# Altium PCB RWSv3.PcbDoc
Units mil, origin at the board's own origin, x right, y up, seen from the top; angles counter-clockwise.
Board outline 3700 x 3475 mil, 2 copper layers (Component Side, Bottom Layer), stack 65.756 mil thick; 70 components, 58 nets, 326 pads, 94 vias.
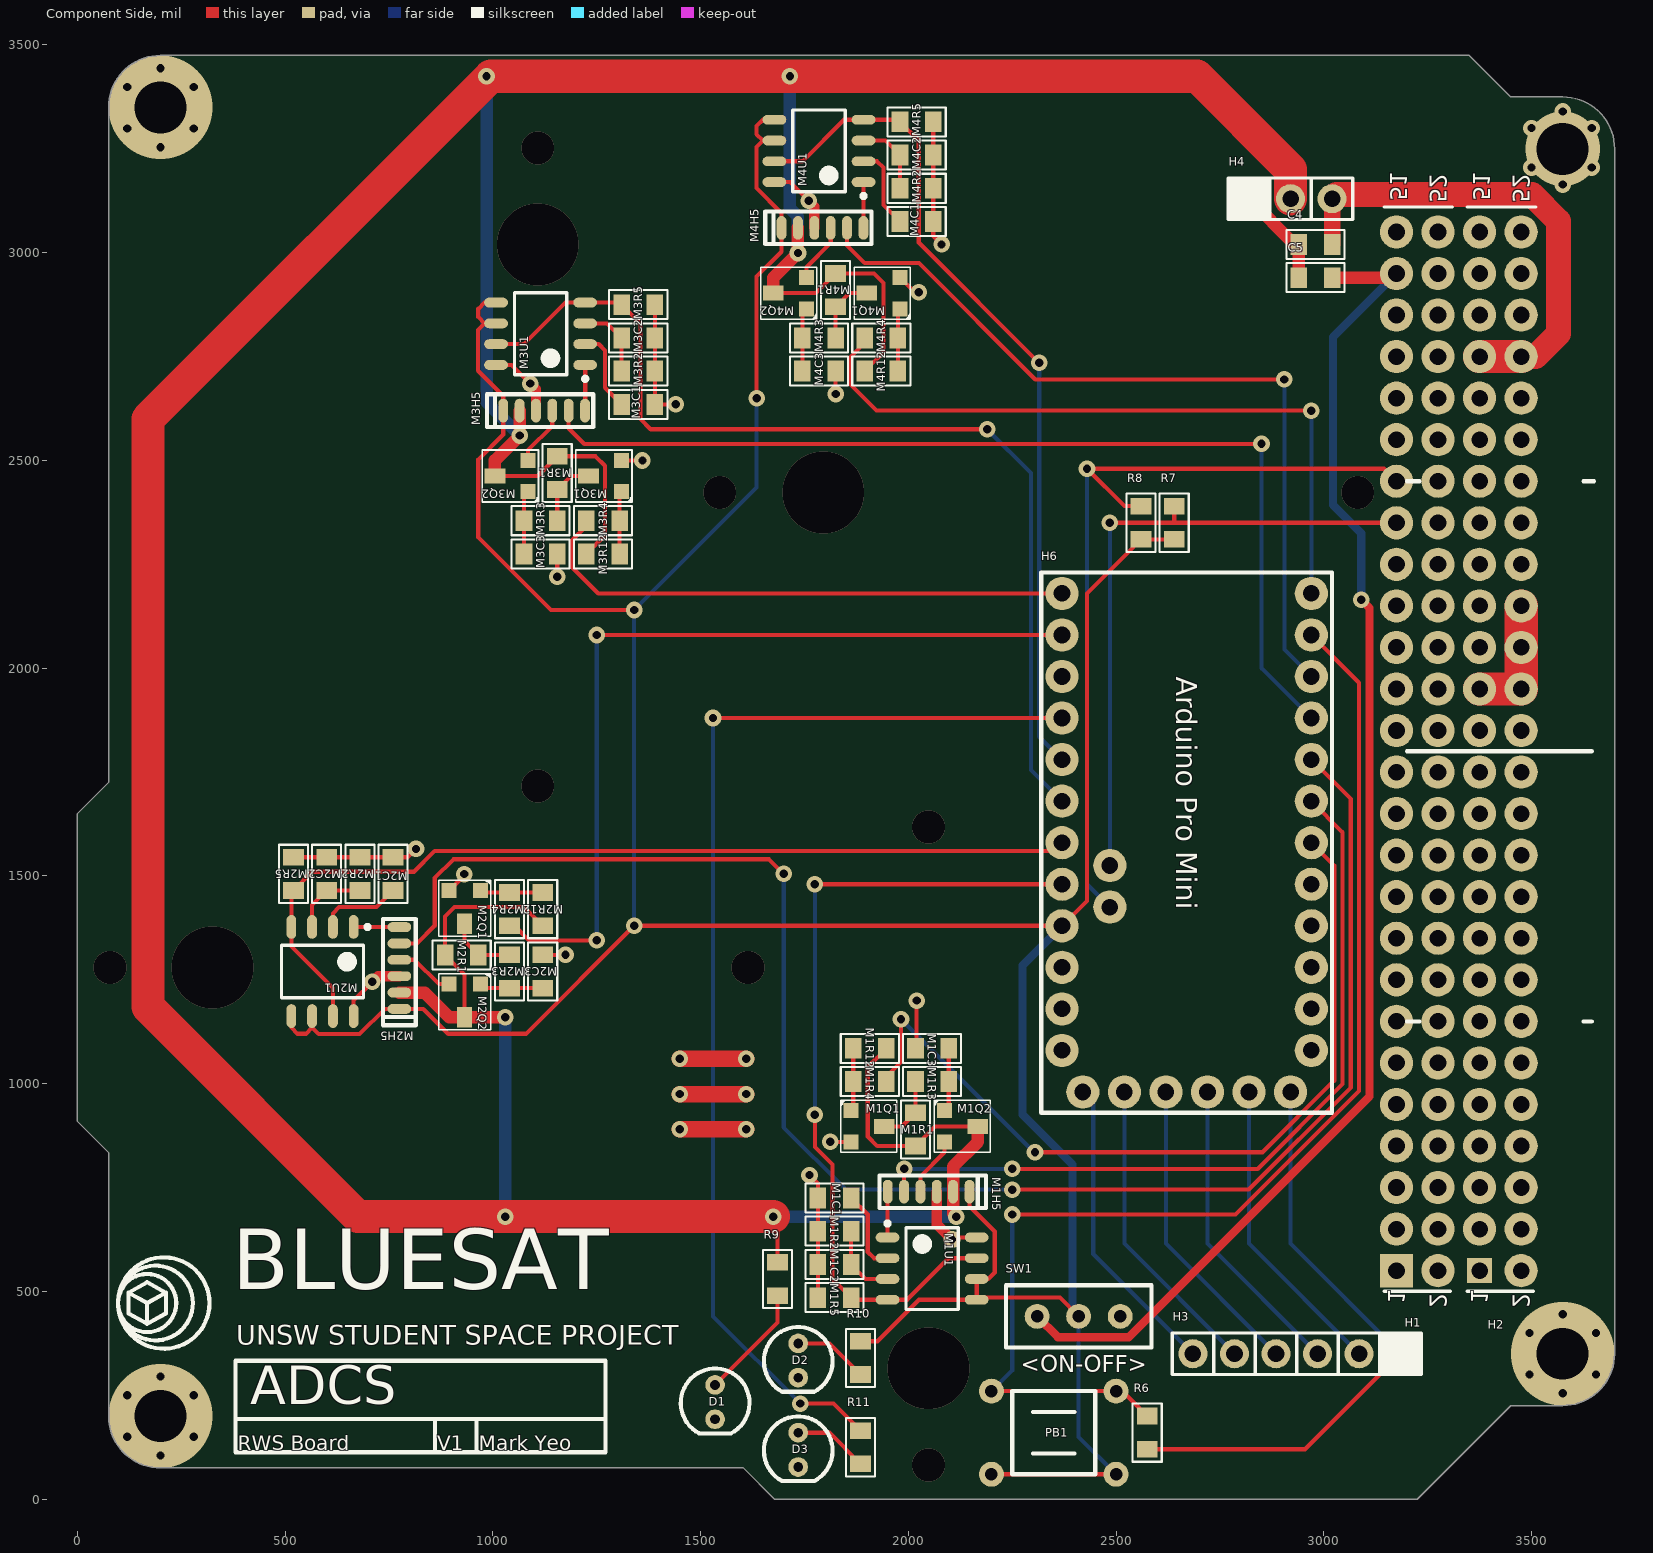
[diagram p0: Component Side view]
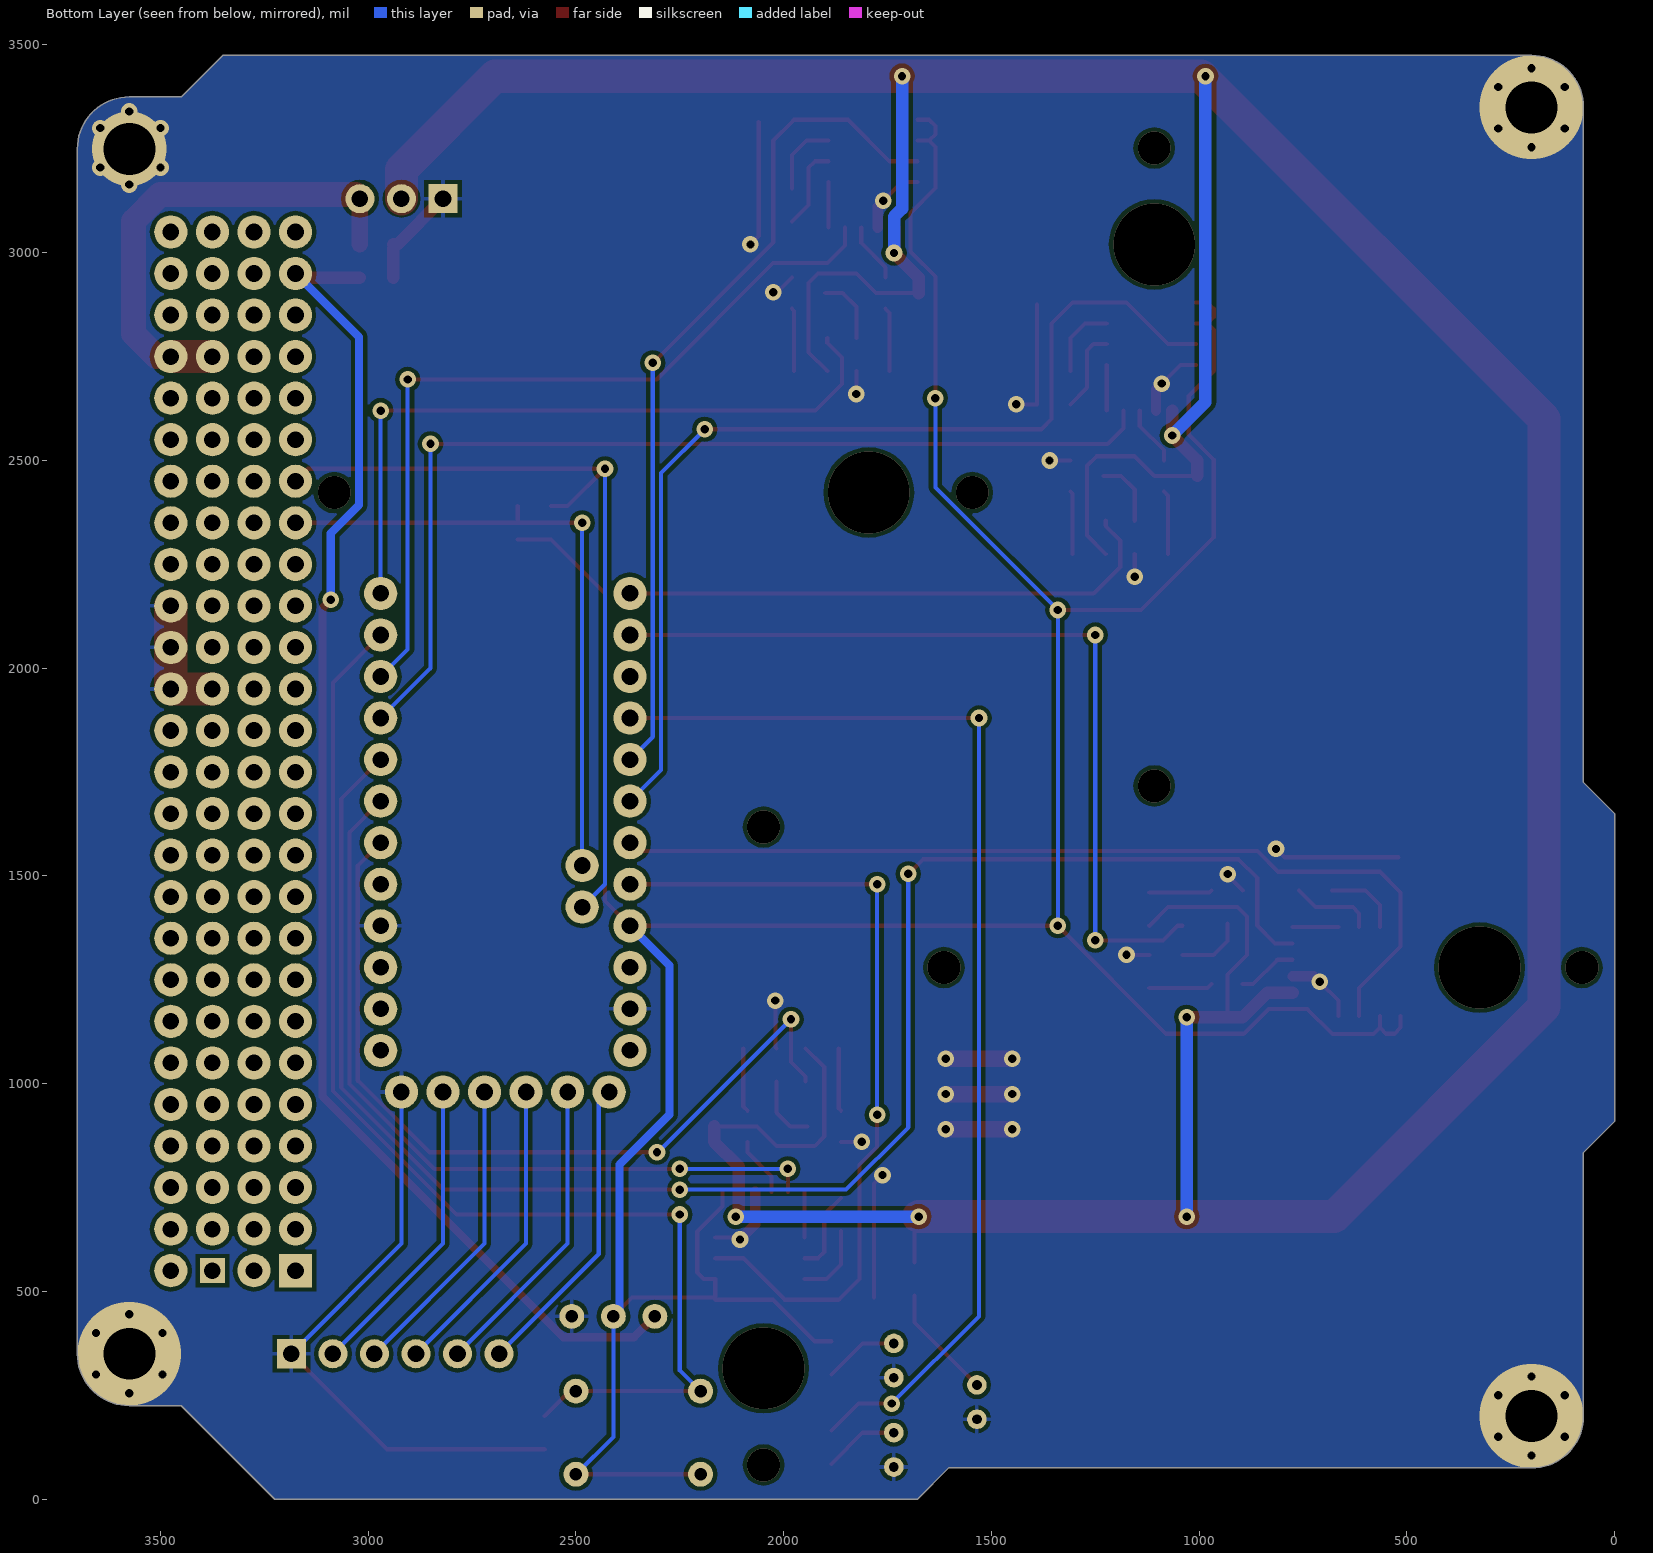
[diagram p1: Bottom Layer view, seen from below]

## Layer stack, top to bottom
Top Solder: solder mask 0.394, Solder Resist, Dk 3.5
Component Side: signal copper 1.378
Dielectric 1: core 63, FR-4, Dk 4.2
Bottom Layer: signal copper 1.378
Solder Side: solder mask 0.394, Solder Resist, Dk 3.5

## Board outline
3575,225 ccw(c3575,350) 3700,350 3700,3250 ccw(c3575,3250) 3575,3375 3450,3375 3350,3475 200,3475 ccw(c200,3350) 75,3350 75,1725 0,1650 0,909 75,834 75,200 ccw(c200,200) 200,75 1603,75 1678,0 3225,0 3450,225

## Design rules (kind name [scope] priority, off if disabled: settings)
Clearance [All] p1: gap=10
Clearance "Clearance (Same Net)" [All] p2: gap=0 except(8: SMDPad-SMDPad SMDPad-THPad SMDPad-Via)
ComponentClearance [All] p1: gap=0 collisioncheckmode=3 verticalgap=0 showdistances=FALSE
HoleSize HoleSize_1 [All] p1 off: absolutevalues=TRUE maxlimit=100000 minlimit=24 maxpercent=80.000 minpercent=20.000
HoleSize HoleSize_2 [All] p2: absolutevalues=TRUE maxlimit=100000 minlimit=20 maxpercent=80.000 minpercent=20.000
HoleSize [All] p3: absolutevalues=TRUE maxlimit=100 minlimit=1 maxpercent=80.000 minpercent=20.000
HoleToHoleClearance mdViaViaSameLayer [All] p1: gap=8 allowstackedmicrovias=TRUE
HoleToHoleClearance [All] p2: gap=10 allowstackedmicrovias=TRUE
PasteMaskExpansion mlMinCreamFrame [All] p1: expansion=0
PasteMaskExpansion [All] p2: expansion=0
PolygonConnect ThermalVias [IsVia] p1: connectstyle=Direct reliefconductorwidth=10 reliefentries=4 polygonreliefangle="90 Angle" airgapwidth=10
PolygonConnect [All] p2: connectstyle=Relief reliefconductorwidth=10 reliefentries=4 polygonreliefangle="90 Angle" airgapwidth=10
RoomDefinition M4 [InComponentClass('M4')] p1: confinementstyle=ConfineIn formatcopy=TRUE lockcomponents=FALSE outline 2102.28,2580 2102.28,3360 1612.28,3360 1612.28,2580
RoomDefinition M3 [InComponentClass('M3')] p2: confinementstyle=ConfineIn formatcopy=TRUE lockcomponents=FALSE outline 1432.28,2140 1432.28,2920 942.28,2920 942.28,2140
RoomDefinition M2 [InComponentClass('M2')] p3: confinementstyle=ConfineIn formatcopy=TRUE lockcomponents=FALSE outline 1255,1587.28 475,1587.28 475,1097.28 1255,1097.28
RoomDefinition M1 [InComponentClass('M1')] p4: confinementstyle=ConfineIn formatcopy=TRUE lockcomponents=FALSE outline 1740,1220 1740,440 2230,440 2230,1220
RoutingVias [All] p1: holewidth=28 width=50 viastyle="Through Hole" minholewidth=28 minwidth=50 maxholewidth=28 maxwidth=50
SilkToSilkClearance [All] p1 off: silktosilkclearance=10
SilkToSolderMaskClearance [IsPad] p1 off: minsilkscreentomaskgap=10 clearancetoexposedcopper=TRUE
SolderMaskExpansion mlMinStopFrame [All] p1: expansion=4
SolderMaskExpansion [All] p2: expansion=4
Width Width_1 [All] p1: maxlimit=100000 minlimit=6 preferedwidth=10
Width [All] p2: maxlimit=10 minlimit=8 preferedwidth=10
24 further rules are at their usual default settings.

## Classes and differential pairs
channel class MotorCircuit: M1 M2 M3 M4
net class SPDMOT[4..1]: SPDMOT1 SPDMOT2 SPDMOT3 SPDMOT4
net class FREQMOT[4..1]: FREQMOT1 FREQMOT2 FREQMOT3 FREQMOT4
net class DIRMOT[4..1]: DIRMOT1 DIRMOT2 DIRMOT3 DIRMOT4
component class RWSv3: C4 C5 D1 D2 D3 H1 H2 H3 H4 H6 L1 PB1 R5 R6 R7 R8 R9 R10 R11 SW1
component class M1: M1C1 M1C2 M1C3 M1H5 M1Q1 M1Q2 M1R1 M1R2 M1R3 M1R4 M1R5 M1R12 M1U1
component class M2: M2C1 M2C2 M2C3 M2H5 M2Q1 M2Q2 M2R1 M2R2 M2R3 M2R4 M2R5 M2R12 M2U1
component class M3: M3C1 M3C2 M3C3 M3H5 M3Q1 M3Q2 M3R1 M3R2 M3R3 M3R4 M3R5 M3R12 M3U1
component class M4: M4C1 M4C2 M4C3 M4H5 M4Q1 M4Q2 M4R1 M4R2 M4R3 M4R4 M4R5 M4R12 M4U1

## Components (designator, comment, footprint, x,y, rotation, side; value= is the part's Value field where it differs from the comment)
C4 "100nF" 0805C-TBD 3010,3020 r180 top
C5 "100nF" 0805C-TBD 3010,2940 r180 top
D1 "LED" LED 1535,275 r0 top
D2 "LED" LED 1735,375 r0 top
D3 "LED" LED 1735,160 r0 top
H1 "26X2 Header" "26X2 Header"#1 3175,550 r90 top
H2 "26X2 Header" "26X2 Header"#2 3375,550 r90 top
H3 "HEADER-1X6" HEADER-1X6 3185,350 r270 top
H4 "HEADER-1X3" HEADER-1X3 2820,3130 r90 top
H6 "Arduino Pro Mini" "Arduino Pro Mini" 2970,1080 r180 top
M1C1 "10nF" 0805C-TBD 1852.28,725 r180 top (schematic designator C1)
M1C2 "1uF" 0805C-GENERIC 1852.28,565 r180 top (schematic designator C2)
M1C3 "1uF" 0805C-GENERIC 2087.28,1085 r180 top (schematic designator C3)
M1H5 "Motor Header" "Motor Header" 2147.28,740 r270 top (schematic designator H5)
M1Q1 "MMBT3904" SOT23-BCE 1862.28,935 r0 top (schematic designator Q1)
M1Q2 "MMBT3904" SOT23-BCE 2087.28,935 r0 top (schematic designator Q2)
M1R1 "1K" 0805R-1K 2017.28,860 r90 top (schematic designator R1)
M1R2 "100K" 0805R-100K 1852.28,645 r180 top (schematic designator R2)
M1R3 "150K" 0805R-150K 2027.28,1005 r0 top (schematic designator R3)
M1R4 "10K" 0805R-10K 1947.28,1005 r180 top (schematic designator R4)
M1R5 "10K" 0805R-10K 1862.28,485 r180 top (schematic designator R5)
M1R12 "10K" 0805R-10K 1867.28,1085 r0 top (schematic designator R12)
M1U1 "LM2907" LM2907 2057.28,555 r0 top (schematic designator U1)
M2C1 "10nF" 0805C-TBD 760,1475 r90 top (schematic designator C1)
M2C2 "1uF" 0805C-GENERIC 600,1475 r90 top (schematic designator C2)
M2C3 "1uF" 0805C-GENERIC 1120,1240 r90 top (schematic designator C3)
M2H5 "Motor Header" "Motor Header" 775,1180 r180 top (schematic designator H5)
M2Q1 "MMBT3904" SOT23-BCE 970,1465 r270 top (schematic designator Q1)
M2Q2 "MMBT3904" SOT23-BCE 970,1240 r270 top (schematic designator Q2)
M2R1 "1K" 0805R-1K 895,1310 r0 top (schematic designator R1)
M2R2 "100K" 0805R-100K 680,1475 r90 top (schematic designator R2)
M2R3 "150K" 0805R-150K 1040,1300 r270 top (schematic designator R3)
M2R4 "10K" 0805R-10K 1040,1380 r90 top (schematic designator R4)
M2R5 "10K" 0805R-10K 520,1465 r90 top (schematic designator R5)
M2R12 "10K" 0805R-10K 1120,1460 r270 top (schematic designator R12)
M2U1 "LM2907" LM2907 590,1270 r270 top (schematic designator U1)
M3C1 "10nF" 0805C-TBD 1320,2635 r0 top (schematic designator C1)
M3C2 "1uF" 0805C-GENERIC 1320,2795 r0 top (schematic designator C2)
M3C3 "1uF" 0805C-GENERIC 1085,2275 r0 top (schematic designator C3)
M3H5 "Motor Header" "Motor Header" 1025,2620 r90 top (schematic designator H5)
M3Q1 "MMBT3904" SOT23-BCE 1310,2425 r180 top (schematic designator Q1)
M3Q2 "MMBT3904" SOT23-BCE 1085,2425 r180 top (schematic designator Q2)
M3R1 "1K" 0805R-1K 1155,2500 r270 top (schematic designator R1)
M3R2 "100K" 0805R-100K 1320,2715 r0 top (schematic designator R2)
M3R3 "150K" 0805R-150K 1145,2355 r180 top (schematic designator R3)
M3R4 "10K" 0805R-10K 1225,2355 r0 top (schematic designator R4)
M3R5 "10K" 0805R-10K 1310,2875 r0 top (schematic designator R5)
M3R12 "10K" 0805R-10K 1305,2275 r180 top (schematic designator R12)
M3U1 "LM2907" LM2907 1115,2805 r180 top (schematic designator U1)
M4C1 "10nF" 0805C-TBD 1990,3075 r0 top (schematic designator C1)
M4C2 "1uF" 0805C-GENERIC 1990,3235 r0 top (schematic designator C2)
M4C3 "1uF" 0805C-GENERIC 1755,2715 r0 top (schematic designator C3)
M4H5 "Motor Header" "Motor Header" 1695,3060 r90 top (schematic designator H5)
M4Q1 "MMBT3904" SOT23-BCE 1980,2865 r180 top (schematic designator Q1)
M4Q2 "MMBT3904" SOT23-BCE 1755,2865 r180 top (schematic designator Q2)
M4R1 "1K" 0805R-1K 1825,2940 r270 top (schematic designator R1)
M4R2 "100K" 0805R-100K 1990,3155 r0 top (schematic designator R2)
M4R3 "150K" 0805R-150K 1815,2795 r180 top (schematic designator R3)
M4R4 "10K" 0805R-10K 1895,2795 r0 top (schematic designator R4)
M4R5 "10K" 0805R-10K 1980,3315 r0 top (schematic designator R5)
M4R12 "10K" 0805R-10K 1975,2715 r180 top (schematic designator R12)
M4U1 "LM2907" LM2907 1785,3245 r180 top (schematic designator U1)
PB1 "PushButton" PushButton 2500,260 r180 top
R6 "4K7" 0805R-4K7 2575,190 r270 top
R7 "4K7" 0805R-4K7 2640,2320 r90 top
R8 "4K7" 0805R-4K7 2560,2320 r90 top
R9 "150R" 0805R-150 1685,560 r270 top
R10 "150R" 0805R-150 1885,370 r270 top
R11 "150R" 0805R-150 1885,155 r270 top
SW1 "ToggleSwitch" SWITCHFOOTPRINT 2310,440 r270 top

## Footprints (in the part's own frame and the unit in brackets; to place one, negate y for a bottom-side part, rotate by r counter-clockwise, add the part's x,y. Pads: shape width x height; smd on the part's side, far side on the other; paste and mask are expansions set on the pad)
"26X2 Header"#1 [mil]
  rect 80x80 hole 40: 1(0,0)
  round 80 hole 40: 2(0,-100) 3(100,0) 4(100,-100) 5(200,0) 6(200,-100) 7(300,0) 8(300,-100) 9(400,0) 10(400,-100) 11(500,0) 12(500,-100) 13(600,0) 14(600,-100) 15(700,0) 16(700,-100) 17(800,0) 18(800,-100) 19(900,0) 20(900,-100) 21(1000,0) 22(1000,-100) 23(1100,0) 24(1100,-100) 25(1200,0) 26(1200,-100) 27(1300,0) 28(1300,-100) 29(1400,0) 30(1400,-100) 31(1500,0) 32(1500,-100) 33(1600,0) 34(1600,-100) 35(1700,0) 36(1700,-100) 37(1800,0) 38(1800,-100) 39(1900,0) 40(1900,-100) 41(2000,0) 42(2000,-100) 43(2100,0) 44(2100,-100) 45(2200,0) 46(2200,-100) 47(2300,0) 48(2300,-100) 49(2400,0) 50(2400,-100) 51(2500,0) 52(2500,-100)
  silkscreen extent -50,-135 2560,30, body extent -55,-150 2555,47, height 126
"26X2 Header"#2 [mil]
  rect 60x60 hole 40: 1(0,0)
  round 80 hole 40: 2(0,-100) 3(100,0) 4(100,-100) 5(200,0) 6(200,-100) 7(300,0) 8(300,-100) 9(400,0) 10(400,-100) 11(500,0) 12(500,-100) 13(600,0) 14(600,-100) 15(700,0) 16(700,-100) 17(800,0) 18(800,-100) 19(900,0) 20(900,-100) 21(1000,0) 22(1000,-100) 23(1100,0) 24(1100,-100) 25(1200,0) 26(1200,-100) 27(1300,0) 28(1300,-100) 29(1400,0) 30(1400,-100) 31(1500,0) 32(1500,-100) 33(1600,0) 34(1600,-100) 35(1700,0) 36(1700,-100) 37(1800,0) 38(1800,-100) 39(1900,0) 40(1900,-100) 41(2000,0) 42(2000,-100) 43(2100,0) 44(2100,-100) 45(2200,0) 46(2200,-100) 47(2300,0) 48(2300,-100) 49(2400,0) 50(2400,-100) 51(2500,0) 52(2500,-100)
  silkscreen extent -50,-135 2560,30, body extent -55,-150 2555,47, height 126
0805C-GENERIC [mil] "CAPACITOR 0805"
  rect 40x50 smd: 1(-10,0) 2(70,0)
  silkscreen extent -40,-35 100,35, body extent -11,-25 70,25, height 26
0805C-TBD [mil] "CAPACITOR 0805"
  rect 40x50 smd: 1(-10,0) 2(70,0)
  silkscreen extent -40,-35 100,35, body extent -11,-25 70,25, height 26
0805R-1K [mil] "RESISTOR 0805"
  rect 40x50 smd: 1(-10,0) 2(70,0)
  silkscreen extent -40,-35 100,35, body extent -11,-25 70,25, height 27
0805R-4K7 [mil] "RESISTOR 0805"
  rect 40x50 smd: 1(-10,0) 2(70,0)
  silkscreen extent -40,-35 100,35, body extent -11,-25 70,25, height 27
0805R-10K [mil] "RESISTOR 0805"
  rect 40x50 smd: 1(0,0) 2(80,0)
  silkscreen extent -30,-35 110,35, body extent -1,-25 80,25, height 27
0805R-100K [mil] "RESISTOR 0805"
  rect 40x50 smd: 1(-10,0) 2(70,0)
  silkscreen extent -40,-35 100,35, body extent -11,-25 70,25, height 27
0805R-150 [mil] "RESISTOR 0805"
  rect 40x50 smd: 1(-10,0) 2(70,0)
  silkscreen extent -40,-35 100,35, body extent -11,-25 70,25, height 27
0805R-150K [mil] "RESISTOR 0805"
  rect 40x50 smd: 1(-10,0) 2(70,0)
  silkscreen extent -40,-35 100,35, body extent -11,-25 70,25, height 27
"Arduino Pro Mini" [mil]
  round 80 hole 40: 1(0,0) 2(0,-100) 3(0,-200) 4(0,-300) 5(0,-400) 6(0,-500) 7(0,-600) 8(0,-700) 9(0,-800) 10(0,-900) 11(0,-1000) 12(0,-1100) 13(600,0) 14(600,-100) 15(600,-200) 16(600,-300) 17(600,-400) 18(600,-500) 19(600,-600) 20(600,-700) 21(600,-800) 22(600,-900) 23(600,-1000) 24(600,-1100) 25(485,-345) 26(485,-445) 27(50,100) 28(150,100) 29(250,100) 30(350,100) 31(450,100) 32(550,100)
  silkscreen extent -50,-1150 650,150
HEADER-1X3 [mil]
  rect 70x70 hole 40: 1(0,0)
  round 70 hole 40: 2(0,-100) 3(0,-200)
  silkscreen extent -50,-250 50,50, body extent -50,-250 50,50, height 470
HEADER-1X6 [mil]
  rect 70x70 hole 40: 1(0,0)
  round 70 hole 40: 2(0,-100) 3(0,-200) 4(0,-300) 5(0,-400) 6(0,-500)
  silkscreen extent -50,-550 50,50, body extent -50,-550 50,50, height 470
LED [mm]
  round 1.2 hole 0.6: 1(0,0) 2(0,-2.1)
  silkscreen extent -2.1,-2.96 2.1,1
LM2907 [mm] "Frequency to Voltage Converter"
  oval 1.45x0.6 smd: 1(-2.725,1.905) 2(-2.725,0.635) 3(-2.725,-0.635) 4(-2.725,-1.905) 5(2.725,-1.905) 6(2.725,-0.635) 7(2.725,0.635) 8(2.725,1.905)
  silkscreen extent -2.85,-2.5 1.6,2.88, body extent -3,-2.5 3,2.5, height 1.75
"Motor Header" [mm]
  oval 1.45x0.6 smd: 1(0,0) 2(0,-1) 3(0,-2) 4(0,-3) 5(0,-4) 6(0,-5)
  silkscreen extent -1,-5.5 1,1
PushButton [mil]
  round 60 hole 30: 5(0,0) 6(300,0) 7(0,200) 8(300,200)
  silkscreen extent 50,0 250,200, body extent 50,0 250,200, height 300
SOT23-BCE [mil]
  rect 36x36 smd: B(0,0) E(0,-75)
  rect 50x36 smd: C(80,-38)
  silkscreen extent -25,-100 110,25, body extent -3,-95 94,20, height 41
SWITCHFOOTPRINT [mil]
  round 60 hole 30: 2(0,0) 3(0,100) 4(0,200)
  silkscreen extent -75,-75 75,275, body extent -75,-75 75,275, height 300

## Part data
C4 C5 M1C1 M2C1 M3C1 M4C1: library part 0805C-100nF-25V-X7R-MUR, "CAPACITOR 0805 CERAMIC"
D1 D2 D3: "Small LED"
M1C2 M2C2 M3C2 M4C2: library part 0805C-10UF-6V3-X5R-PAN, "CAPACITOR 0805 CERAMIC"
M1C3 M2C3 M3C3 M4C3: library part 0805C-2U2-6V3-X5R-PAN, "CAPACITOR 0805 CERAMIC"
M1Q1 M1Q2 M2Q1 M2Q2 M3Q1 M3Q2 M4Q1 M4Q2: library part MMBT2222, "BC847 SMALL SIGNAL NPN TRANSISTOR"
M1R1 M2R1 M3R1 M4R1: library part 0805R-1K, "RESISTOR 0805 1/4 WATT THIN FILM"
M1R2 M2R2 M3R2 M4R2: library part 0805R-100K, "RESISTOR 0805 1/4 WATT THIN FILM"
M1R3 M2R3 M3R3 M4R3: library part 0805R-150K, "RESISTOR 0805 1/4 WATT THIN FILM"
M1R4 M1R5 M1R12 M2R4 M2R5 M2R12 M3R4 M3R5 M3R12 M4R4 M4R5 M4R12: library part 0805R-10K, "RESISTOR 0805 1/4 WATT THIN FILM"
M1U1 M2U1 M3U1 M4U1: "Freq to Voltage Converter"
R6 R7 R8: library part 0805R-4K7, "RESISTOR 0805 1/4 WATT THIN FILM"
R9 R10 R11: library part 0805R-150, "RESISTOR 0805 1/4 WATT THIN FILM"

## Via types
v1: diameter 40, hole 20, Component Side to Bottom Layer, 78 vias
v2: diameter 78.74, hole 78.74, Component Side to Bottom Layer, 8 vias
v3: diameter 196.85, hole 196.85, Component Side to Bottom Layer, 4 vias
v4: diameter 250, hole 125, Component Side to Bottom Layer, 3 vias
v5: diameter 180, hole 125, Component Side to Bottom Layer, 1 vias

## Nets (pads, with @x,y where several pads share a name; then routed paths per layer and width w, separated by ;. In a path a pad name is that pad's centre, name@x,y a point inside that pad or via, vN(x,y) a via of type N, cw(c..) or ccw(c..) an arc to the next point about the centre after c; other vN are vias at no path point)
3V3_IN: H1.50
5V_IN: C5.1 H1.49 SW1.2 | length 3300.9
  Component Side w20: SW1.2@2310,439.29 SW1.2 2360,390 2530.71,390 3110,969.29 3110,2145 v1(3090,2165)
  Component Side w30: C5.1 3165,2940 H1.49
  Bottom Layer w20: v1(3090,2165) 3090,2325 3022.13,2392.87 3022.13,2797.13 H1.49
7V4: H4.2 M1H5.2 M1Q2.C M1R1.1 M1R12.2 M2H5.2 M2Q2.C M2R1.1 M2R12.2 M3H5.2 M3Q2.C M3R1.1 M3R12.2 M4H5.2 M4Q2.C M4R1.1 M4R12.2 R9.1 | length 11731.3
  Component Side w10: M2Q2.C 932,1263 M2R1.1 885,1402.21 907.79,1425 1075,1425 M2R12.2 ; M3Q2.C 1108,2463 M3R1.1 1247.21,2510 1270,2487.21 1270,2320 M3R12.2 ; v1(1675,680) 1685,670 R9.1 ; M4Q2.C 1778,2903 M4R1.1 1917.21,2950 1940,2927.21 1940,2760 M4R12.2 ; M1R12.2 1902.28,1040 1902.28,872.79 1925.07,850 M1R1.1 2064.28,897 M1Q2.C
  Component Side w30: M2H5.2 835.63,1219.37 895,1160 M2Q2.C v1(1030,1160) ; M3Q2.C 1005,2500 1064.37,2559.37 M3H5.2 ; M4Q2.C 1675,2940 v1(1734.37,2999.37) M4H5.2 ; v1(2115,680) 2107.91,687.09 M1H5.2 2107.91,800.63 2167.28,860 M1Q2.C
  Component Side w80: v1(1675,680) v1(1030,680) 675,680 170,1185 170,2600 995,3425 2695,3425 2920,3200 H4.2
  Bottom Layer w30: v1(984.84,3424.84) 984.84,2640.16 v1(1065,2560) ; v1(1030,680) v1(1030,1160) ; v1(1675,680) v1(2115,680) ; 1715,3106.36 1734.37,3086.99 v1(1734.37,2999.37) ; 1715,3111.36 v1(1715,3425)
7V4_IN: C4.1 H2.45 H2.46 H4.3 | length 1155.3
  Component Side w40: C4.1 H4.3
  Component Side w60: H4.3@3030,3140 3501.01,3140 3565,3076.01 3565,2805 3510,2750 H2.46
  Component Side w80: H2.45 H2.46
DIRMOT1: H6.7 M1H5.5 | length 1906.6
  Component Side w10: M1H5.5 v1(1990,795) ; v1(2250,795) 2841.07,795 3045,998.93 3045,1605 H6.7
  Bottom Layer w10: v1(1990,795) v1(2250,795)
DIRMOT2: H6.8 M2H5.5 | length 4058.3
  Component Side w10: M2H5.5 817.48,1337.48 860,1380 860,1495 905,1540 1665,1540 v1(1700,1505) ; v1(2250,745) 2819.35,745 3065,990.65 3065,1685 H6.8
  Bottom Layer w10: v1(1700,1505) 1700,895 1850,745 v1(2250,745)
DIRMOT3: H6.9 M3H5.5 | length 2435.2
  Component Side w10: M3H5.5 1182.48,2577.52 1220,2540 v1(2850,2540)
  Bottom Layer w10: v1(2850,2540) 2850,2000 H6.9
DIRMOT4: H6.10 M4H5.5 | length 1970.5
  Component Side w10: M4H5.5 1852.48,3017.52 1895,2975 2025.5,2975 2305.5,2695 v1(2905,2695)
  Bottom Layer w10: v1(2905,2695) 2905,2045 H6.10
FREQMOT1: H6.17 M1R5.1 M1U1.4 M1U1.7 | length 1971.9
  Component Side w10: v1(1775,925) 1775,847.79 1817.28,805.5 1817.28,530 M1R5.1 1867.28,480 M1U1.4 1997.28,480 2097.28,580 M1U1.7 ; v1(1775,1480) H6.17
  Bottom Layer w10: v1(1775,925) v1(1775,1480)
FREQMOT2: H6.18 M2R5.1 M2U1.4 M2U1.7 | length 2243.4
  Component Side w10: M2U1.7 615,1230 515,1330 M2U1.4 515,1460 M2R5.1 565,1510 810,1510 860,1560 2350,1560 H6.18
FREQMOT3: H6.19 M3R5.1 M3U1.4 M3U1.7 | length 2454.3
  Component Side w10: M3U1.7 1075,2780 1175,2880 M3U1.4 1305,2880 M3R5.1 1355,2830 1355,2600 1380,2575 v1(2190,2575)
  Bottom Layer w10: v1(2190,2575) 2295,2470 2295,1755 H6.19
FREQMOT4: H6.20 M4R5.1 M4U1.4 M4U1.7 | length 2042.3
  Component Side w10: M4U1.7 1745,3220 1845,3320 M4U1.4 1975,3320 M4R5.1 2025,3270 2025,3025 v1(2315,2735)
  Bottom Layer w10: v1(2315,2735) 2315,1835 H6.20
GND: C4.2 C5.2 D1.2 D2.2 D3.2 H2.29 H2.30 H2.32 H2.34 H3.1 H4.1 H6.4 H6.14 H6.27 M1C1.2 M1C2.2 M1C3.2 M1H5.3 M1Q1.E M1R2.2 M1R5.2 M1U1.8 M2C1.2 M2C2.2 M2C3.2 M2H5.3 M2Q1.E M2R2.2 M2R5.2 M2U1.8 M3C1.2 M3C2.2 M3C3.2 M3H5.3 M3Q1.E M3R2.2 M3R5.2 M3U1.8 M4C1.2 M4C2.2 M4C3.2 M4H5.3 M4Q1.E M4R2.2 M4R5.2 M4U1.8 R6.2 SW1.4 | length 4858
  Component Side w10: M2R5.2 M2C2.2 M2R2.2 M2C1.2 795,1545 v1(815,1565) ; M2U1.8 665,1200 v1(710,1245) ; M2Q1.E 931.09,1501.09 v1(931.09,1504.51) ; M3U1.8 1045,2730 v1@1103.74,2671.26 ; M2C3.2 v1(1175,1310) ; v1(1155,2220) M3C3.2 ; M3Q1.E v1(1360,2500) ; M3R5.2 M3C2.2 M3R2.2 M3C1.2 v1(1440,2635) ; M4U1.8 1715,3170 v1@1773.74,3111.26 ; v1(1762.28,780) 1782.28,760 M1C1.2 M1R2.2 M1C2.2 M1R5.2 ; v1(1812.28,860) M1Q1.E ; v1(1825,2660) M4C3.2 ; M4Q1.E 2015,2905 v1(2025,2905) ; M1C3.2 2020,1087.72 v1(2020,1200) ; M4R5.2 M4C2.2 M4R2.2 M4C1.2 2060,3040 v1(2080,3020) ; v1@2100,630 M1U1.8 ; R6.2 2955,120 H3.1
  Component Side w25: v1(710,1245) 723.74,1258.74 M2H5.3 ; M3H5.3 v1@1103.74,2671.26 ; M4H5.3 v1@1773.74,3111.26 ; M1H5.3 2068.54,661.46 v1@2100,630
  Component Side w30: H4.1 2930,3020 C4.2 ; C5.2 C4.2@2940,3010
  Component Side w40: v1(1450,890) v1(1610,890) ; v1(1450,975) v1(1610,975) ; v1(1450,1060) v1(1610,1060)
  Component Side w80: H2.29 H2.30 H2.32 H2.34
  Bottom Layer w10: H6.27 2920,615 H3.1
  other v1: 200,105 120,150 280,150 120,250 280,250 3575,255 200,295 3495,300 3655,300 3495,400 3655,400 3575,445 2105,625 1090,2685 1760,3125 3575,3164 3500,3205 3645,3205 200,3254 120,3299 280,3299 3500,3300 3645,3300 3575,3340 120,3399 280,3399 200,3444
  other v4: 200,200 3575,350 200,3350
  other v5: 3575,3250
LED_G: H6.21 R11.1 | length 2748.9
  Component Side w10: v1(1530,1880) H6.21 ; v1(1740,230) 1820,230 R11.1
  Bottom Layer w10: v1(1530,1880) 1530,440 v1(1740,230)
M1FREQ: M1H5.6 M1U1.1 | length 109.6
  Component Side w10: M1U1.1 M1H5.6@1950,739.57
M1SPD: M1H5.4 M1Q2.E | length 144.1
  Component Side w10: M1H5.4 2029.17,776.89 2087.28,835 M1Q2.E
M2FREQ: M2H5.6 M2U1.1 | length 109.6
  Component Side w10: M2U1.1 M2H5.6@774.57,1377.28
M2SPD: M2H5.4 M2Q2.E | length 144.1
  Component Side w10: M2H5.4 811.89,1298.11 870,1240 M2Q2.E
M3FREQ: M3H5.6 M3U1.1 | length 109.6
  Component Side w10: M3H5.6@1222.28,2620.43 M3U1.1
M3SPD: M3H5.4 M3Q2.E | length 144.1
  Component Side w10: M3Q2.E 1085,2525 1143.11,2583.11 M3H5.4
M4FREQ: M4H5.6 M4U1.1 | length 109.6
  Component Side w10: M4H5.6@1892.28,3060.43 M4U1.1
M4SPD: M4H5.4 M4Q2.E | length 144.1
  Component Side w10: M4Q2.E 1755,2965 1813.11,3023.11 M4H5.4
NetD1_1: D1.1 R9.2 | length 277.1
  Component Side w10: D1.1 1685,425 R9.2
NetD2_1: D2.1 R10.2 | length 181.1
  Component Side w10: D2.1 1810,375 R10.2
NetD3_1: D3.1 R11.2 | length 181.1
  Component Side w10: D3.1 1810,160 R11.2
NetH3_2: H3.2 H6.28 | length 739.8
  Bottom Layer w10: H6.28 2820,615 H3.2
NetH3_3: H3.3 H6.29 | length 739.8
  Bottom Layer w10: H6.29 2720,615 H3.3
NetH3_4: H3.4 H6.30 | length 739.8
  Bottom Layer w10: H6.30 2620,615 H3.4
NetH3_5: H3.5 H6.31 | length 739.8
  Bottom Layer w10: H6.31 2520,615 H3.5
NetH3_6: H3.6 H6.32 | length 739.8
  Bottom Layer w10: H6.32 2445,955 2445,590 H3.6
NetM1C1_1: M1C1.1 M1U1.2 | length 200.5
  Component Side w10: M1C1.1 1902.28,685 1902.28,595 1917.28,580 M1U1.2
NetM1C2_1: M1C2.1 M1R2.1 M1U1.3 | length 182.2
  Component Side w10: M1R2.1 M1C2.1 1897.28,530 M1U1.3
NetM1C3_1: M1C3.1 M1Q2.B M1R3.2 | length 154.1
  Component Side w10: M1Q2.B 2097.28,945 M1R3.2 M1C3.1
NetM1Q1_B: M1Q1.B M1R4.2 M1R12.1 | length 152.1
  Component Side w10: M1Q1.B 1867.28,940 M1R4.2 M1R12.1
NetM1Q1_C: M1Q1.C M1R1.2 M1R3.1 | length 163.7
  Component Side w10: M1Q1.C 1984.28,897 M1R1.2 M1R3.1
NetM2C1_1: M2C1.1 M2U1.2 | length 200.5
  Component Side w10: M2U1.2 615,1410 630,1425 720,1425 M2C1.1
NetM2C2_1: M2C2.1 M2R2.1 M2U1.3 | length 182.2
  Component Side w10: M2U1.3 565,1430 M2C2.1 M2R2.1
NetM2C3_1: M2C3.1 M2Q2.B M2R3.2 | length 154.1
  Component Side w10: M2Q2.B 980,1230 M2R3.2 M2C3.1
NetM2Q1_B: M2Q1.B M2R4.2 M2R12.1 | length 152.1
  Component Side w10: M2Q1.B 975,1460 M2R4.2 M2R12.1
NetM2Q1_C: M2Q1.C M2R1.2 M2R3.1 | length 163.7
  Component Side w10: M2Q1.C 932,1343 M2R1.2 M2R3.1
NetM3C1_1: M3C1.1 M3U1.2 | length 200.5
  Component Side w10: M3U1.2 1255,2780 1270,2765 1270,2675 M3C1.1
NetM3C2_1: M3C2.1 M3R2.1 M3U1.3 | length 182.2
  Component Side w10: M3U1.3 1275,2830 M3C2.1 M3R2.1
NetM3C3_1: M3C3.1 M3Q2.B M3R3.2 | length 154.1
  Component Side w10: M3C3.1 M3R3.2 1075,2415 M3Q2.B
NetM3Q1_B: M3Q1.B M3R4.2 M3R12.1 | length 152.1
  Component Side w10: M3R12.1 M3R4.2 1305,2420 M3Q1.B
NetM3Q1_C: M3Q1.C M3R1.2 M3R3.1 | length 163.7
  Component Side w10: M3R3.1 M3R1.2 1188,2463 M3Q1.C
NetM4C1_1: M4C1.1 M4U1.2 | length 200.5
  Component Side w10: M4U1.2 1925,3220 1940,3205 1940,3115 M4C1.1
NetM4C2_1: M4C2.1 M4R2.1 M4U1.3 | length 182.2
  Component Side w10: M4U1.3 1945,3270 M4C2.1 M4R2.1
NetM4C3_1: M4C3.1 M4Q2.B M4R3.2 | length 154.1
  Component Side w10: M4C3.1 M4R3.2 1745,2855 M4Q2.B
NetM4Q1_B: M4Q1.B M4R4.2 M4R12.1 | length 152.1
  Component Side w10: M4R12.1 M4R4.2 1975,2860 M4Q1.B
NetM4Q1_C: M4Q1.C M4R1.2 M4R3.1 | length 163.7
  Component Side w10: M4R3.1 M4R1.2 1858,2903 M4Q1.C
PUSH_BUTTON: H6.11 PB1.5 PB1.6 R6.1 | length 2949
  Component Side w10: PB1.6 PB1.5 2515,260 R6.1 ; v1(2250,685) 2787.63,685 3085,982.37 3085,1965 H6.11
  Bottom Layer w10: PB1.6 2250,310 v1(2250,685)
SCL_ADCS: H1.39 H6.25 R8.2 | length 2002.5
  Component Side w10: R8.2 2520,2390 v1(2430,2480) 3145,2480 H1.39
  Bottom Layer w10: v1(2430,2480) 2430,1480 H6.25
SDA_ADCS: H1.37 H6.26 R7.2 | length 1555
  Component Side w10: v1(2485,2350) 2640,2350 ; R7.2 2640,2350 ; H1.37 2640,2350
  Bottom Layer w10: H6.26 v1(2485,2350)
SPDMOT1: H6.6 M1R4.1 | length 2006.7
  Component Side w10: M1R4.1 1947.28,1017.28 1982.28,1052.28 v1(1982.28,1155) ; v1(2305,835) 2852.78,835 3025,1007.22 3025,1525 H6.6
  Bottom Layer w10: v1(1982.28,1155) 2302.28,835 v1(2305,835)
SPDMOT2: H6.23 M2R4.1 | length 2079.5
  Component Side w10: M2R4.1 1052.28,1380 1087.28,1345 v1(1250,1345) ; v1(1250,2080) H6.23
  Bottom Layer w10: v1(1250,1345) v1(1250,2080)
SPDMOT3: H6.24 M3R4.1 | length 1332.1
  Component Side w10: M3R4.1 1225,2342.72 1190,2307.72 1190,2243.79 1253.79,2180 H6.24
SPDMOT4: H6.12 M4R4.1 | length 1700.9
  Component Side w10: M4R4.1 1895,2782.72 1860,2747.72 1860,2683.79 1923.79,2620 ; 1925,2620 v1(2970,2620)
  Bottom Layer w10: H6.12 v1(2970,2620)
VCC: H6.16 M1H5.1 M1U1.5 M1U1.6 M2H5.1 M2U1.5 M2U1.6 M3H5.1 M3U1.5 M3U1.6 M4H5.1 M4U1.5 M4U1.6 PB1.7 PB1.8 R7.1 R8.1 R10.1 SW1.3 | length 9151.6
  Component Side w10: M2U1.5 515,1135 530,1120 550,1120 M2U1.6@565,1135 ; M2U1.6 M2U1.6@565,1135 ; M3U1.6 M3U1.6@980,2830 ; M3U1.5 980,2880 965,2865 965,2845 M3U1.6@980,2830 ; v1(1340,2140) 1140,2140 965,2315 965,2502.43 1025,2562.43 M3H5.1 1025,2655 964.17,2715.83 964.17,2814.17 M3U1.6@980,2830 ; v1(1635,2650) 1635,2942.43 1695,3002.43 M4H5.1 1695,3095 1634.17,3155.83 1634.17,3254.17 M4U1.6@1650,3270 ; M4U1.6 M4U1.6@1650,3270 ; M4U1.5 1650,3320 1635,3305 1635,3285 M4U1.6@1650,3270 ; R10.1 1925.57,380 2025.57,480 M1U1.5 ; M1H5.1 2147.28,705 2208.11,644.17 2208.11,545.83 2192.28,530 M1U1.6 2164.57,485 2365,485 SW1.3 ; PB1.8 PB1.7 ; R7.1 R8.1 2430,2180 2430,1440 H6.16 v1(1340,1380) 1080,1120 892.57,1120 832.57,1180 M2H5.1 740,1180 679.17,1119.17 580.83,1119.17 M2U1.6@565,1135
  Bottom Layer w10: v1(1340,1380) v1(1340,2140) 1340.12,2140 1635,2434.88 v1(1635,2650) ; SW1.3 2410,150 PB1.7
  Bottom Layer w20: H6.16 2275,1285 2275,925.29 2395,805.29 2395,455 SW1.3
pads on no net: H1.1 H1.2 H1.3 H1.4 H1.5 H1.6 H1.7 H1.8 H1.9 H1.10 H1.11 H1.12 H1.13 H1.14 H1.15 H1.16 H1.17 H1.18 H1.19 H1.20 H1.21 H1.22 H1.23 H1.24 H1.25 H1.26 H1.27 H1.28 H1.29 H1.30 H1.31 H1.32 H1.33 H1.34 H1.35 H1.36 H1.38 H1.40 H1.41 H1.42 H1.43 H1.44 H1.45 H1.46 H1.47 H1.48 H1.51 H1.52 H2.1 H2.2 H2.3 H2.4 H2.5 H2.6 H2.7 H2.8 H2.9 H2.10 H2.11 H2.12 H2.13 H2.14 H2.15 H2.16 H2.17 H2.18 H2.19 H2.20 H2.21 H2.22 H2.23 H2.24 H2.25 H2.26 H2.27 H2.28 H2.31 H2.33 H2.35 H2.36 H2.37 H2.38 H2.39 H2.40 H2.41 H2.42 H2.43 H2.44 H2.47 H2.48 H2.49 H2.50 H2.51 H2.52 H6.1 H6.2 H6.3 H6.5 H6.13 H6.15 H6.22
copper on no net:
  other v2: 2048.43,82.28 78.74,1279.53 1614.17,1279.53 2048.43,1617.72 1108.27,1716.54 1546.06,2422.83 3081.5,2422.83 1108.27,3251.97
  other v3: 2048.43,314.96 325,1279.53 1795,2422.84 1108.27,3020

## Polygon pours and split planes (outlines as drawn)
GND on Bottom Layer "Bottom Layer-GND" (solid, pour order 5): 75,200 75,834 0,909 0,1650 75,1725 75,3350 cw(c200,3350) 200,3475 3350,3475 3450,3375 3575,3375 cw(c3575,3250) 3700,3250 3700,350 cw(c3575,350) 3575,225 3450,225 3225,0 1678,0 1603,75 200,75 cw(c200,200)

## Silkscreen, mask and mechanical layers (free items; w line width, h text height)
Top Overlay:
  circle w10: c208,472 r110
  circle w10: c188,472 r90
  circle w10: c168,472 r70
  lines w10: 381,193 1271,193 ; 861,113 861,193 ; 961,113 961,193 ; 3200,1150 3230,1150 ; 3200,1800 3645,1800 ; 3200,2450 3230,2450 ; 3625,1150 3645,1150 ; 3625,2450 3650,2450 ; 123,497 168,522 213,497 ; 123,497 123,447 168,422 ; 123,497 168,472 ; 168,422 213,447 213,497 ; 168,422 168,472 ; 168,472 213,497 ; 381,113 1271,113 1271,333 381,333 381,113
  text "BLUESAT" at 373,457 h250
  text "UNSW STUDENT SPACE PROJECT" at 383,372 h47.24
  text "<ON-OFF>" at 2270,305 h40
  text "ADCS" at 416,198 h157.48
  text "RWS Board" at 386,118 h35
  text "V1" at 866,118 h35
  text "Mark Yeo" at 966,118 h35
Mechanical 13:
  lines w10: 0,909 0,1650 75,1725 75,3350 cw(c200,3350) 200,3475 3350,3475 3450,3375 3500,3375 3575,3375 cw(c3575,3250) 3700,3250 3700,350 cw(c3575,350) 3575,225 3500,225 3450,225 3225,0 1678,0 1603,75 200,75 cw(c200,200) 75,200 75,834 0,909

## Text inside footprints (layer, text, board x,y; h text height)
H1: Top Overlay "52" at 3255,3120.16 h40 r270; Top Overlay "51" at 3160,3125.16 h40 r270; Top Overlay "1" at 3155,470.16 h40 r270; Top Overlay "2" at 3255,460.16 h40 r270
H2: Top Overlay "52" at 3455,3120.16 h40 r270; Top Overlay "51" at 3360,3125.16 h40 r270; Top Overlay "1" at 3355,470.16 h40 r270; Top Overlay "2" at 3455,460.16 h40 r270